# Altium PCB PCB2.PcbDoc
Units mm, origin at the board's own origin, x right, y up, seen from the top; angles counter-clockwise.
Board outline 152.4 x 101.6 mm, 2 copper layers (Top Layer, Bottom Layer); 54 components, 32 nets, 147 pads, 1 vias.
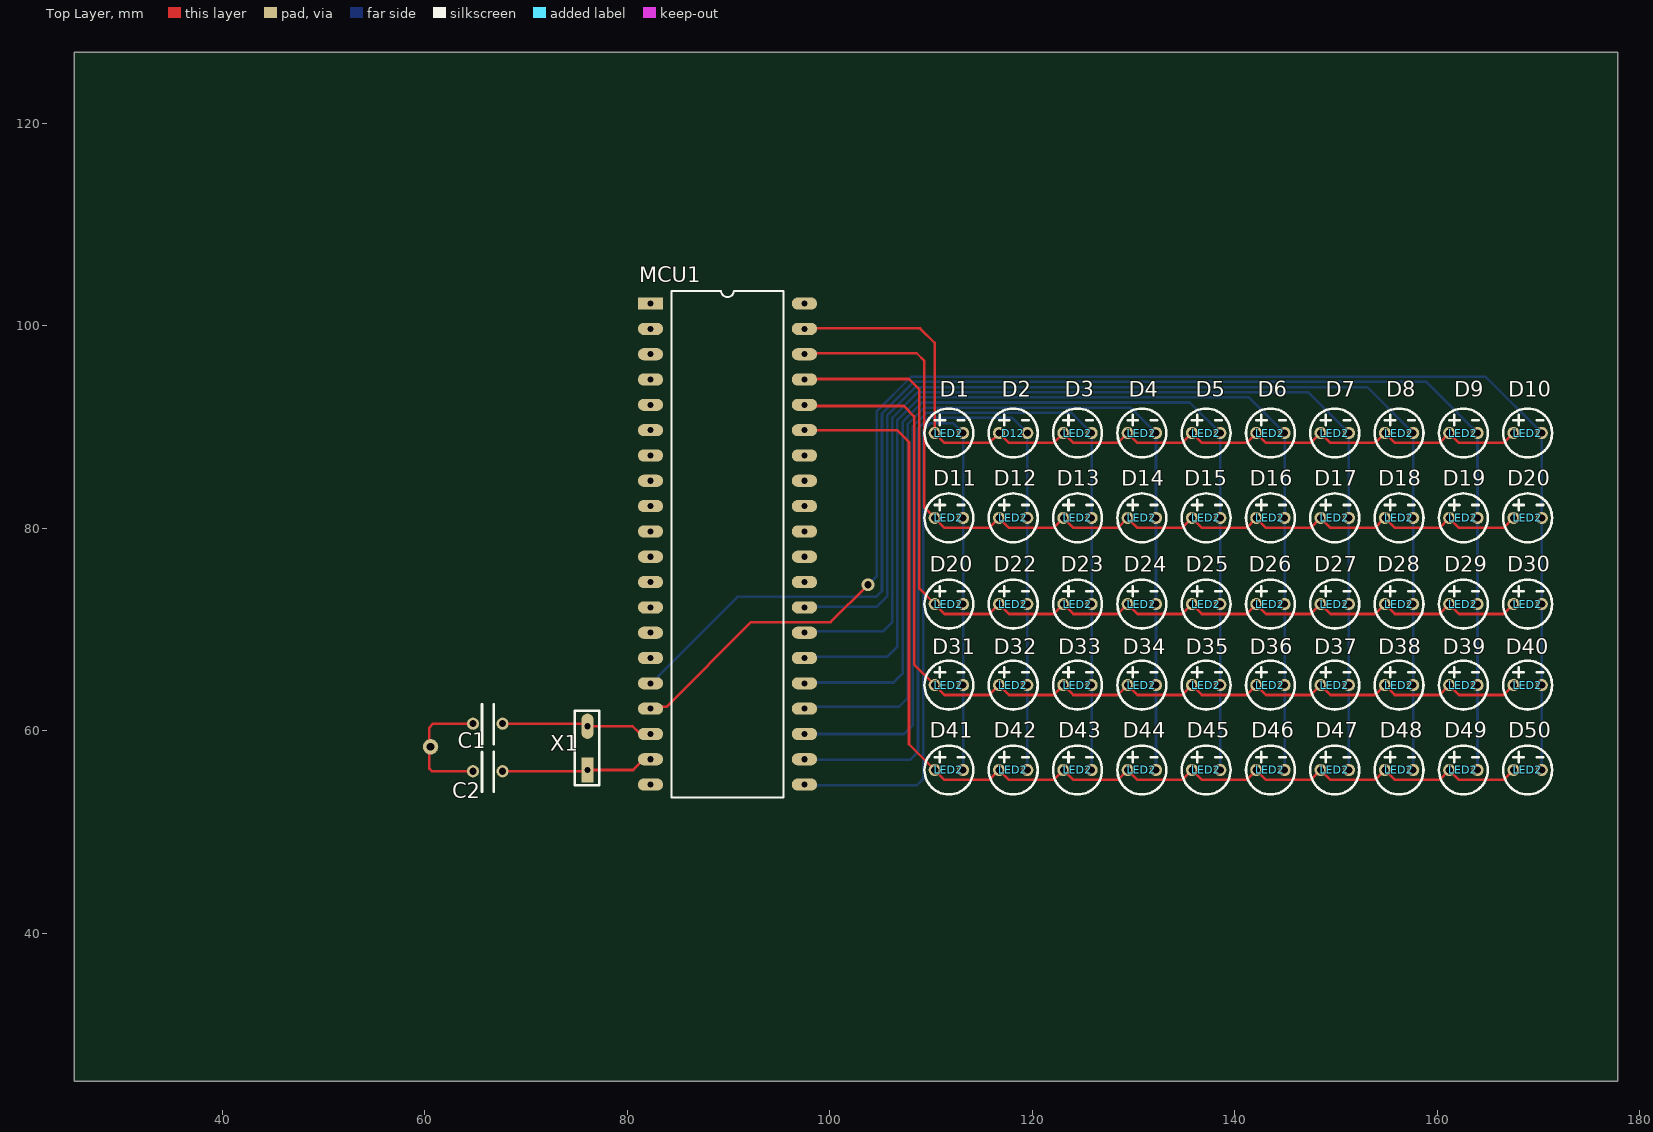
[diagram p0: Top Layer view]
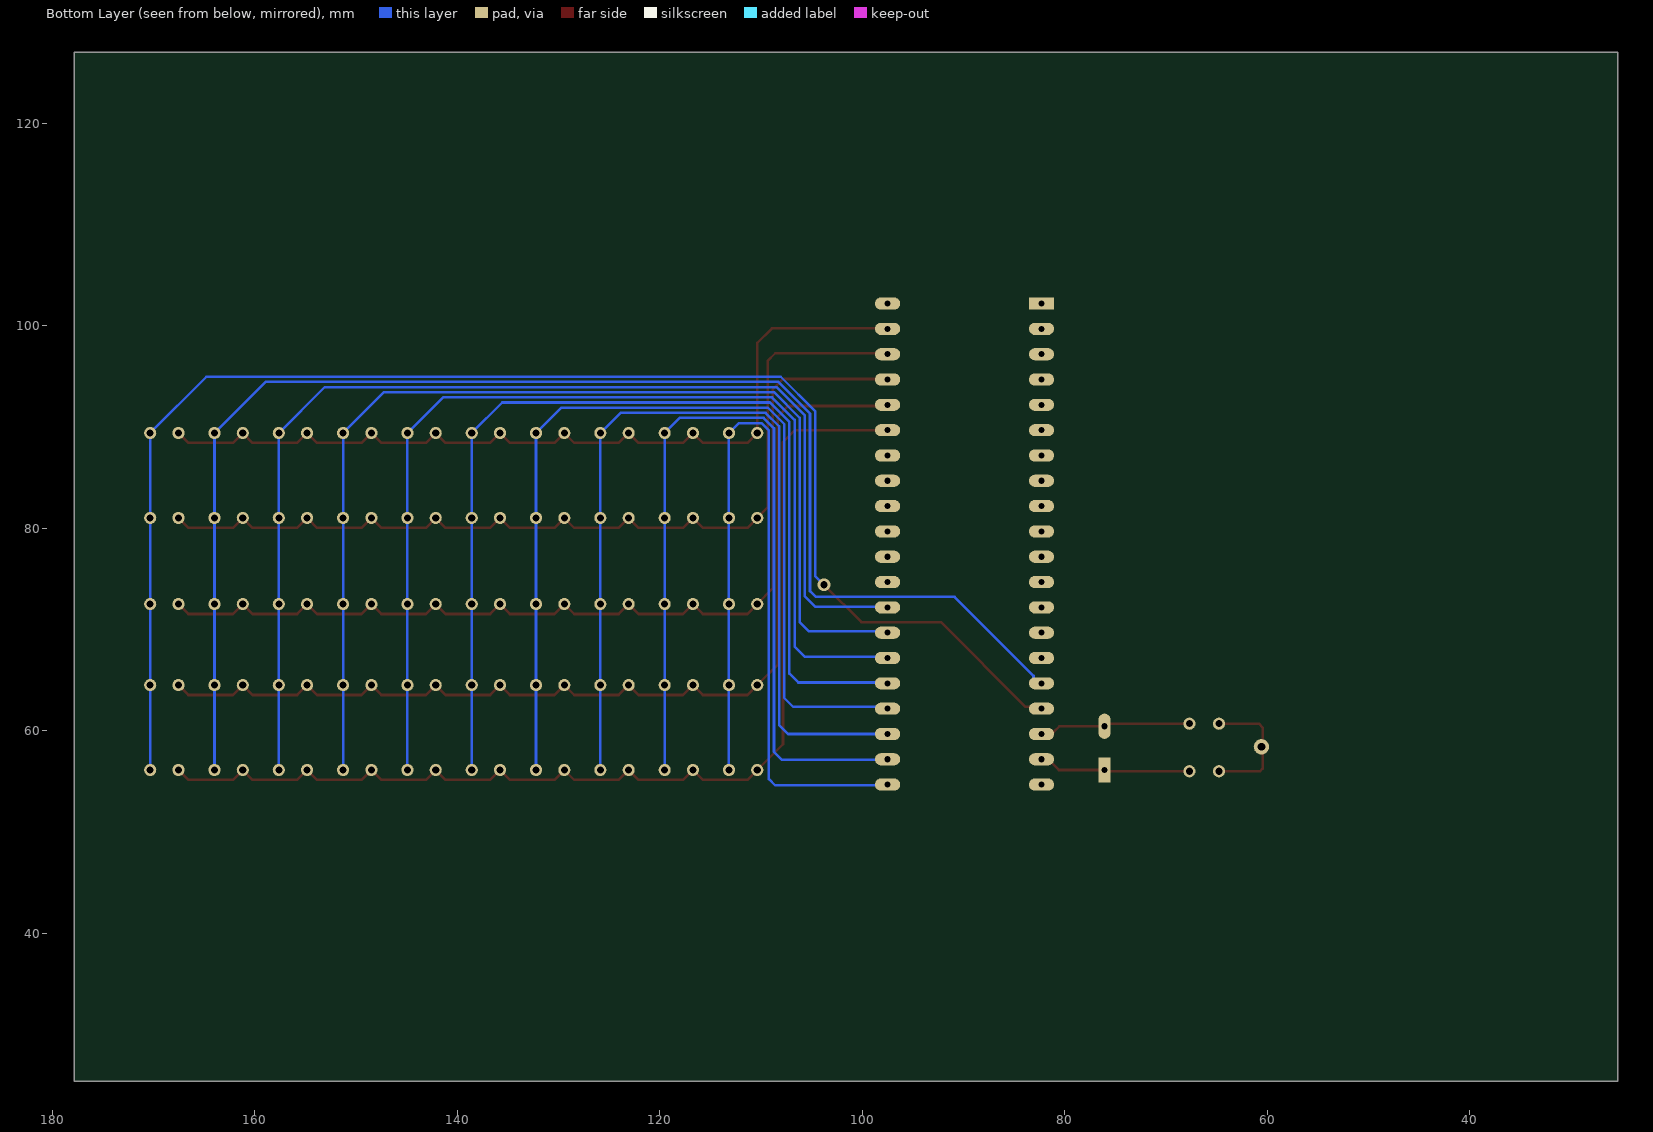
[diagram p1: Bottom Layer view, seen from below]

## Layer stack, top to bottom
Top Solder: solder mask 0.0102, Solder Resist, Dk 3.5
Top Layer: signal copper 0.0356
Dielectric 1: dielectric 0.32, FR-4, Dk 4.8
Bottom Layer: signal copper 0.0356
Bottom Solder: solder mask 0.0102, Solder Resist, Dk 3.5

## Board outline
25.4,25.4 177.8,25.4 177.8,127 25.4,127

## Design rules (kind name [scope] priority, off if disabled: settings)
Clearance [All] p1: gap=0.254 ignorepadtopadclearanceinfootprint=FALSE
PolygonConnect [All] p1: connectstyle=Relief reliefconductorwidth=0.254 reliefentries=4 polygonreliefangle="90 Angle" airgapwidth=0.254
RoutingVias [All] p1: holewidth=0.711 width=1.27 viastyle="Through Hole" minholewidth=0.711 minwidth=1.27 maxholewidth=0.711 maxwidth=1.27
SolderMaskExpansion [All] p1: expansion=0.102 istentingtop=FALSE
SupplyNets "Schematic Supply Nets_1" [InNet('VCC')] p1: voltage=0.000
SupplyNets "Schematic Supply Nets" [InNet('GND')] p2: voltage=0.000
Width [All] p1: maxlimit=0.254 minlimit=0.254 preferedwidth=0.254
30 further rules are at their usual default settings.

## Classes and differential pairs
component class Sheet2: LED2 X1

## Components (designator, comment, footprint, x,y, rotation, side; value= is the part's Value field where it differs from the comment)
C1 "Comment" Capacitor 55.372,60.706 r0 top
C2 "Comment" Capacitor 55.372,56.007 r0 top
D12 "D2" LED2 106.426,89.535 r0 top (schematic designator D2)
LED2 "D50" LED2 157.226,56.261 r0 top (schematic designator D50)
LED2 "D49" LED2 150.876,56.261 r0 top (schematic designator D49)
LED2 "D48" LED2 144.526,56.261 r0 top (schematic designator D48)
LED2 "D47" LED2 138.176,56.261 r0 top (schematic designator D47)
LED2 "D46" LED2 131.826,56.261 r0 top (schematic designator D46)
LED2 "D45" LED2 125.476,56.261 r0 top (schematic designator D45)
LED2 "D44" LED2 119.126,56.261 r0 top (schematic designator D44)
LED2 "D43" LED2 112.776,56.261 r0 top (schematic designator D43)
LED2 "D42" LED2 106.426,56.261 r0 top (schematic designator D42)
LED2 "D41" LED2 100.076,56.261 r0 top (schematic designator D41)
LED2 "D40" LED2 157.226,64.643 r0 top (schematic designator D40)
LED2 "D39" LED2 150.876,64.643 r0 top (schematic designator D39)
LED2 "D38" LED2 144.526,64.643 r0 top (schematic designator D38)
LED2 "D37" LED2 138.176,64.643 r0 top (schematic designator D37)
LED2 "D36" LED2 131.826,64.643 r0 top (schematic designator D36)
LED2 "D35" LED2 125.476,64.643 r0 top (schematic designator D35)
LED2 "D34" LED2 119.126,64.643 r0 top (schematic designator D34)
LED2 "D33" LED2 112.776,64.643 r0 top (schematic designator D33)
LED2 "D32" LED2 106.426,64.643 r0 top (schematic designator D32)
LED2 "D31" LED2 100.076,64.643 r0 top (schematic designator D31)
LED2 "D30" LED2 157.226,72.644 r0 top (schematic designator D30)
LED2 "D29" LED2 150.876,72.644 r0 top (schematic designator D29)
LED2 "D28" LED2 144.526,72.644 r0 top (schematic designator D28)
LED2 "D27" LED2 138.176,72.644 r0 top (schematic designator D27)
LED2 "D26" LED2 131.826,72.644 r0 top (schematic designator D26)
LED2 "D25" LED2 125.476,72.644 r0 top (schematic designator D25)
LED2 "D24" LED2 119.126,72.644 r0 top (schematic designator D24)
LED2 "D23" LED2 112.776,72.644 r0 top (schematic designator D23)
LED2 "D22" LED2 106.426,72.644 r0 top (schematic designator D22)
LED2 "D20" LED2 100.076,72.644 r0 top (schematic designator D21)
LED2 "D20" LED2 157.226,81.153 r0 top (schematic designator D20)
LED2 "D19" LED2 150.876,81.153 r0 top (schematic designator D19)
LED2 "D18" LED2 144.526,81.153 r0 top (schematic designator D18)
LED2 "D17" LED2 138.176,81.153 r0 top (schematic designator D17)
LED2 "D16" LED2 131.826,81.153 r0 top (schematic designator D16)
LED2 "D15" LED2 125.476,81.153 r0 top (schematic designator D15)
LED2 "D14" LED2 119.126,81.153 r0 top (schematic designator D14)
LED2 "D13" LED2 112.776,81.153 r0 top (schematic designator D13)
LED2 "D12" LED2 106.426,81.153 r0 top (schematic designator D12)
LED2 "D11" LED2 100.076,81.153 r0 top (schematic designator D11)
LED2 "D10" LED2 157.226,89.535 r0 top (schematic designator D10)
LED2 "D9" LED2 150.876,89.535 r0 top (schematic designator D9)
LED2 "D8" LED2 144.526,89.535 r0 top (schematic designator D8)
LED2 "D7" LED2 138.176,89.535 r0 top (schematic designator D7)
LED2 "D6" LED2 131.826,89.535 r0 top (schematic designator D6)
LED2 "D5" LED2 125.476,89.535 r0 top (schematic designator D5)
LED2 "D4" LED2 119.126,89.535 r0 top (schematic designator D4)
LED2 "D3" LED2 112.776,89.535 r0 top (schematic designator D3)
LED2 "D1" LED2 100.076,89.535 r0 top (schematic designator D1)
MCU1 "STC12C5A60S2" STC12C5A60S2 82.296,102.19 r0 top
X1 "X1" Crystal 76.073,56.134 r90 top

## Footprints (in the part's own frame and the unit in brackets; to place one, negate y for a bottom-side part, rotate by r counter-clockwise, add the part's x,y. Pads: shape width x height; smd on the part's side, far side on the other; paste and mask are expansions set on the pad)
Capacitor [mm]
  round 1.2 hole 0.7: 1(9.398,0) 2(12.319,0)
  silkscreen extent 10.29,-2.03 11.43,1.91
Crystal [mm]
  rect 2.5x1.2 hole 0.6: 1(0,0)
  oval 2.5x1.2 hole 0.6: 2(4.318,0)
  silkscreen extent -1.52,-1.14 5.84,1.27
LED2 [mm]
  round 1.2 hole 0.7: 1(10.287,-0.127) 2(13.081,-0.127)
  silkscreen extent 9.27,-2.54 14.1,2.29
STC12C5A60S2 [mm]
  rect 2.5x1.2 hole 0.6: 1(0,0)
  oval 2.5x1.2 hole 0.6: 2(0,-2.5) 3(0,-5) 4(0,-7.5) 5(0,-10) 6(0,-12.5) 7(0,-15) 8(0,-17.5) 9(0,-20) 10(0,-22.5) 11(0,-25) 12(0,-27.5) 13(0,-30) 14(0,-32.5) 15(0,-35) 16(0,-37.5) 17(0,-40) 18(0,-42.5) 19(0,-45) 20(0,-47.5) 21(15.2,-47.5) 22(15.2,-45) 23(15.2,-42.5) 24(15.2,-40) 25(15.2,-37.5) 26(15.2,-35) 27(15.2,-32.5) 28(15.2,-30) 29(15.2,-27.5) 30(15.2,-25) 31(15.2,-22.5) 32(15.2,-20) 33(15.2,-17.5) 34(15.2,-15) 35(15.2,-12.5) 36(15.2,-10) 37(15.2,-7.5) 38(15.2,-5) 39(15.2,-2.5) 40(15.2,0)
  silkscreen extent 2.08,-48.75 13.12,1.25

## Part data
D12 LED2 LED2 LED2 LED2 LED2 LED2 LED2 LED2 LED2 LED2 LED2 LED2 LED2 LED2 LED2 LED2 LED2 LED2 LED2 LED2 LED2 LED2 LED2 LED2 LED2 LED2 LED2 LED2 LED2 LED2 LED2 LED2 LED2 LED2 LED2 LED2 LED2 LED2 LED2 LED2 LED2 LED2 LED2 LED2 LED2 LED2 LED2 LED2 LED2: library part LED2
X1: library part Crystal

## Free pads (board coordinates)
  round 1.524 hole 0.762: 8(60.579,58.42)

## Via types
v1: diameter 1.27, hole 0.711, Top Layer to Bottom Layer, 1 vias

## Nets (pads, with @x,y where several pads share a name; then routed paths per layer and width w, separated by ;. In a path a pad name is that pad's centre, name@x,y a point inside that pad or via, vN(x,y) a via of type N, cw(c..) or ccw(c..) an arc to the next point about the centre after c; other vN are vias at no path point)
Beep: MCU1.13
GND: MCU1.20
GND2: C1.1 C2.1 pad.8 | length 13
  Top Layer w0.254: pad.8@60.452,58.42 60.452,56.261 60.706,56.007 C2.1 ; pad.8 60.452,59.309 60.452,60.325 60.833,60.706 C1.1
H1: D12.1 LED2.1@110.363,89.408 LED2.1@123.063,89.408 LED2.1@129.413,89.408 LED2.1@135.763,89.408 LED2.1@142.113,89.408 LED2.1@148.463,89.408 LED2.1@154.813,89.408 LED2.1@161.163,89.408 LED2.1@167.513,89.408 MCU1.39 | length 85.9
  Top Layer w0.254: MCU1.39@98.298,99.822 98.371,99.749 108.912,99.749 110.363,98.298 110.363,89.408 111.344,88.427 115.732,88.427 116.586,89.281 D12.1@116.586,89.408 ; D12.1 117.694,88.427 122.082,88.427 122.936,89.281 LED2.1@122.936,89.408 ; LED2.1@123.063,89.408 124.044,88.427 128.432,88.427 129.413,89.408 130.394,88.427 134.782,88.427 135.763,89.408 136.744,88.427 141.132,88.427 142.113,89.408 143.094,88.427 147.482,88.427 148.463,89.408 149.444,88.427 153.832,88.427 154.813,89.408 155.794,88.427 160.182,88.427 161.163,89.408 162.144,88.427 166.532,88.427 LED2.1@167.513,89.408
H2: LED2.1@110.363,81.026 LED2.1@116.713,81.026 LED2.1@123.063,81.026 LED2.1@129.413,81.026 LED2.1@135.763,81.026 LED2.1@142.113,81.026 LED2.1@148.463,81.026 LED2.1@154.813,81.026 LED2.1@161.163,81.026 LED2.1@167.513,81.026 MCU1.38 | length 91.7
  Top Layer w0.254: MCU1.38@98.298,97.282 108.585,97.282 109.347,96.52 109.347,82.042 110.363,81.026 111.344,80.045 115.732,80.045 116.713,81.026 117.694,80.045 122.082,80.045 123.063,81.026 124.044,80.045 128.432,80.045 129.413,81.026 130.394,80.045 134.782,80.045 135.763,81.026 136.744,80.045 141.132,80.045 142.113,81.026 143.094,80.045 147.482,80.045 148.463,81.026 149.444,80.045 153.832,80.045 154.686,80.899 LED2.1@154.813,80.899 ; LED2.1@154.813,81.026 155.794,80.045 160.182,80.045 161.163,81.026 162.144,80.045 166.532,80.045 LED2.1@167.513,81.026
H3: LED2.1@110.363,72.517 LED2.1@116.713,72.517 LED2.1@123.063,72.517 LED2.1@129.413,72.517 LED2.1@135.763,72.517 LED2.1@142.113,72.517 LED2.1@148.463,72.517 LED2.1@154.813,72.517 LED2.1@161.163,72.517 LED2.1@167.513,72.517 MCU1.37 | length 97.1
  Top Layer w0.254: MCU1.37@98.425,94.742 107.823,94.742 108.839,93.726 108.839,74.041 110.363,72.517 111.344,71.536 115.732,71.536 116.713,72.517 117.694,71.536 122.082,71.536 122.936,72.39 LED2.1@123.063,72.39 ; LED2.1@123.063,72.517 124.044,71.536 128.432,71.536 129.413,72.517 130.394,71.536 134.782,71.536 135.763,72.517 136.744,71.536 141.132,71.536 142.113,72.517 143.094,71.536 147.482,71.536 148.463,72.517 149.444,71.536 153.832,71.536 154.813,72.517 155.794,71.536 160.182,71.536 161.163,72.517 162.144,71.536 166.532,71.536 LED2.1@167.513,72.517
H4: LED2.1@110.363,64.516 LED2.1@116.713,64.516 LED2.1@123.063,64.516 LED2.1@129.413,64.516 LED2.1@135.763,64.516 LED2.1@142.113,64.516 LED2.1@148.463,64.516 LED2.1@154.813,64.516 LED2.1@161.163,64.516 LED2.1@167.513,64.516 MCU1.36 | length 102.4
  Top Layer w0.254: MCU1.36@98.298,92.202 98.425,92.075 107.315,92.075 108.331,91.059 108.331,66.548 110.363,64.516 111.344,63.535 115.732,63.535 116.713,64.516 117.694,63.535 122.082,63.535 123.063,64.516 124.044,63.535 128.432,63.535 129.413,64.516 130.394,63.535 134.782,63.535 135.763,64.516 136.744,63.535 141.132,63.535 142.113,64.516 143.094,63.535 147.482,63.535 148.463,64.516 149.444,63.535 153.832,63.535 154.813,64.516 155.794,63.535 160.182,63.535 161.163,64.516 162.144,63.535 166.532,63.535 LED2.1@167.513,64.516
H5: LED2.1@110.363,56.134 LED2.1@116.713,56.134 LED2.1@123.063,56.134 LED2.1@129.413,56.134 LED2.1@135.763,56.134 LED2.1@142.113,56.134 LED2.1@148.463,56.134 LED2.1@154.813,56.134 LED2.1@161.163,56.134 LED2.1@167.513,56.134 MCU1.35 | length 108
  Top Layer w0.254: MCU1.35@98.298,89.789 98.425,89.662 106.68,89.662 107.823,88.519 107.823,58.674 110.363,56.134 111.344,55.153 115.732,55.153 116.713,56.134 117.694,55.153 122.082,55.153 123.063,56.134 124.044,55.153 128.432,55.153 129.413,56.134 130.394,55.153 134.782,55.153 135.763,56.134 136.744,55.153 141.132,55.153 142.113,56.134 143.094,55.153 147.482,55.153 148.463,56.134 149.444,55.153 153.832,55.153 154.813,56.134 155.794,55.153 160.182,55.153 161.163,56.134 162.144,55.153 166.532,55.153 LED2.1@167.513,56.134
H6: MCU1.34
H7: MCU1.33
H8: MCU1.32
IRIN: MCU1.12
L1: LED2.2@113.157,56.134 LED2.2@113.157,64.516 LED2.2@113.157,72.517 LED2.2@113.157,81.026 LED2.2@113.157,89.408 MCU1.21 | length 83.6
  Bottom Layer w0.254: MCU1.21@98.298,54.737 98.425,54.61 108.585,54.61 109.22,55.245 109.22,89.652 109.957,90.389 112.176,90.389 113.157,89.408 113.157,81.026 113.157,72.517 113.157,64.516 LED2.2@113.157,56.134
L2: D12.2 LED2.2@119.507,56.134 LED2.2@119.507,64.516 LED2.2@119.507,72.517 LED2.2@119.507,81.026 MCU1.22 | length 87.8
  Bottom Layer w0.254: MCU1.22@98.298,57.15 107.95,57.15 108.712,57.912 108.712,89.863 109.746,90.897 118.018,90.897 D12.2 119.507,81.026 119.507,72.517 119.507,64.516 LED2.2@119.507,56.134
L3: LED2.2@125.857,56.134 LED2.2@125.857,64.516 LED2.2@125.857,72.517 LED2.2@125.857,81.026 LED2.2@125.857,89.408 MCU1.23 | length 91.9
  Bottom Layer w0.254: MCU1.23@98.425,59.69 107.315,59.69 108.204,60.579 108.204,90.073 109.536,91.405 123.86,91.405 125.857,89.408 125.857,81.026 125.857,72.517 125.857,64.516 LED2.2@125.857,56.134
L4: LED2.2@132.207,56.134 LED2.2@132.207,64.516 LED2.2@132.207,72.517 LED2.2@132.207,81.026 LED2.2@132.207,89.408 MCU1.24 | length 96.4
  Bottom Layer w0.254: MCU1.24@98.298,62.23 98.425,62.357 106.807,62.357 107.696,63.246 107.696,90.284 109.325,91.913 129.702,91.913 132.207,89.408 132.207,81.026 132.207,72.517 132.207,64.516 LED2.2@132.207,56.134
L5: LED2.2@138.557,56.134 LED2.2@138.557,64.516 LED2.2@138.557,72.517 LED2.2@138.557,81.026 LED2.2@138.557,89.408 MCU1.25 | length 100.8
  Bottom Layer w0.254: MCU1.25@98.298,64.77 106.299,64.77 107.188,65.659 107.188,90.494 109.115,92.421 135.544,92.421 138.557,89.408 138.557,81.026 138.557,72.517 138.557,64.516 LED2.2@138.557,56.134
L6: LED2.2@144.907,56.134 LED2.2@144.907,64.516 LED2.2@144.907,72.517 LED2.2@144.907,81.026 LED2.2@144.907,89.408 MCU1.26 | length 105.1
  Bottom Layer w0.254: MCU1.26@98.298,67.31 105.664,67.31 106.68,68.326 106.68,90.704 108.905,92.929 141.386,92.929 144.907,89.408 144.907,81.026 144.907,72.517 144.907,64.516 LED2.2@144.907,56.134
L7: LED2.2@151.257,56.134 LED2.2@151.257,64.516 LED2.2@151.257,72.517 LED2.2@151.257,81.026 LED2.2@151.257,89.408 MCU1.27 | length 109.5
  Bottom Layer w0.254: MCU1.27@98.298,69.85 105.283,69.85 106.172,70.739 106.172,90.915 108.694,93.437 147.228,93.437 151.257,89.408 151.257,81.026 151.257,72.517 151.257,64.516 LED2.2@151.257,56.134
L8: LED2.2@157.607,56.134 LED2.2@157.607,64.516 LED2.2@157.607,72.517 LED2.2@157.607,81.026 LED2.2@157.607,89.408 MCU1.28 | length 113.9
  Bottom Layer w0.254: MCU1.28@98.298,72.263 104.648,72.263 105.664,73.279 105.664,91.125 108.484,93.945 153.07,93.945 157.607,89.408 157.607,81.026 157.607,72.517 157.607,64.516 LED2.2@157.607,56.134
L9: LED2.2@163.957,56.134 LED2.2@163.957,64.516 LED2.2@163.957,72.517 LED2.2@163.957,81.026 LED2.2@163.957,89.408 MCU1.16 | length 140.2
  Bottom Layer w0.254: MCU1.16@82.293,64.64 82.597,64.64 83.084,65.127 83.084,65.431 90.883,73.23 104.584,73.23 105.156,73.802 105.156,91.336 108.273,94.453 158.912,94.453 163.957,89.408 163.957,81.026 163.957,72.517 163.957,64.516 LED2.2@163.957,56.134 ; MCU1.16@83.098,64.749 MCU1.16@83.426,64.749
L10: LED2.2@170.307,56.134 LED2.2@170.307,64.516 LED2.2@170.307,72.517 LED2.2@170.307,81.026 LED2.2@170.307,89.408 MCU1.17 | length 145.7
  Top Layer w0.254: MCU1.17@83.058,62.357 83.856,62.357 92.229,70.73 100.067,70.73 v1(103.759,74.422)
  Bottom Layer w0.254: v1(103.759,74.422) 104.648,75.311 104.648,91.567 108.042,94.961 164.754,94.961 LED2.2@170.307,89.408 ; LED2.2@170.307,56.134 170.307,64.516 170.307,72.517 170.307,81.026 LED2.2@170.307,89.281
NetB1_1: 
NetC1_1: 
NetC2_1: 
NetL1_1: 
NetL1_2: 
RXD: MCU1.10
TXD: MCU1.11
VCC: MCU1.40
XTAL1: C1.2 MCU1.18 X1.2 | length 15
  Top Layer w0.254: C1.2 75.819,60.706 X1.2 80.518,60.452 81.099,59.871 82.115,59.871 MCU1.18
XTAL2: C2.2 MCU1.19 X1.1 | length 15.7
  Top Layer w0.254: C2.2 75.946,56.007 X1.1 80.59,56.134 81.479,57.023 MCU1.19@82.423,57.023 ; MCU1.19@81.701,57.19 MCU1.19
pads on no net: MCU1.1 MCU1.2 MCU1.3 MCU1.4 MCU1.5 MCU1.6 MCU1.7 MCU1.8 MCU1.9 MCU1.14 MCU1.15 MCU1.29 MCU1.30 MCU1.31